# EAGLE board rtu (EAGLE 9.3.0)
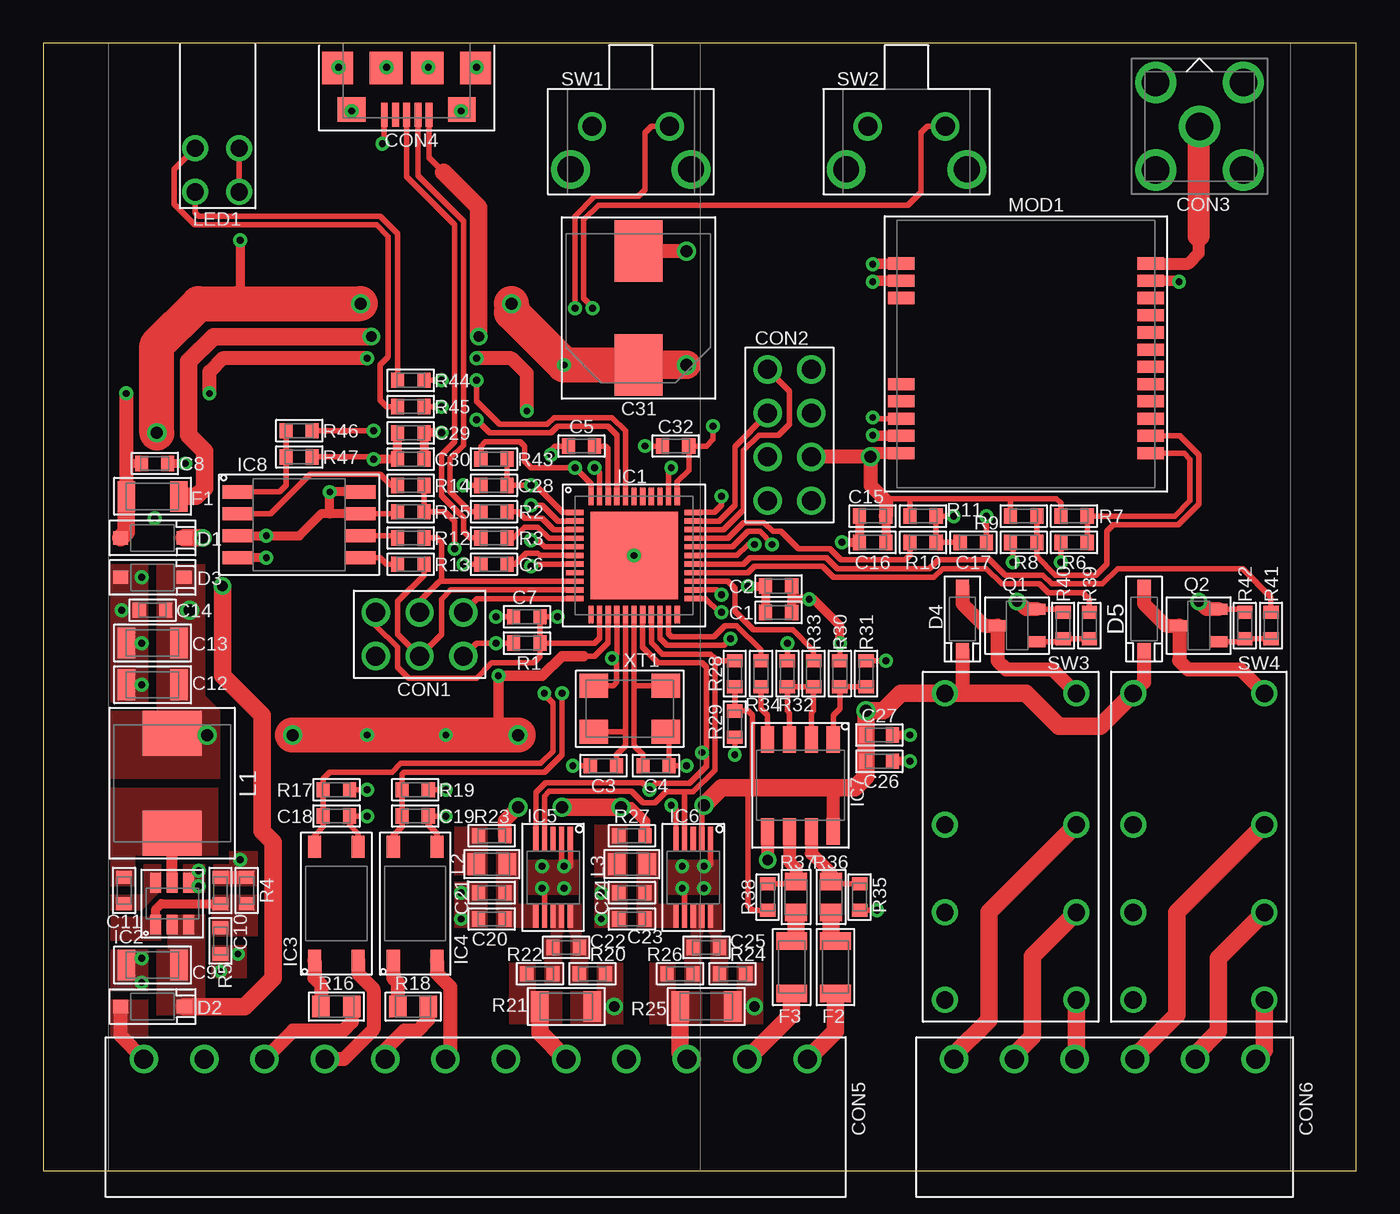
[diagram p0: board, top side]
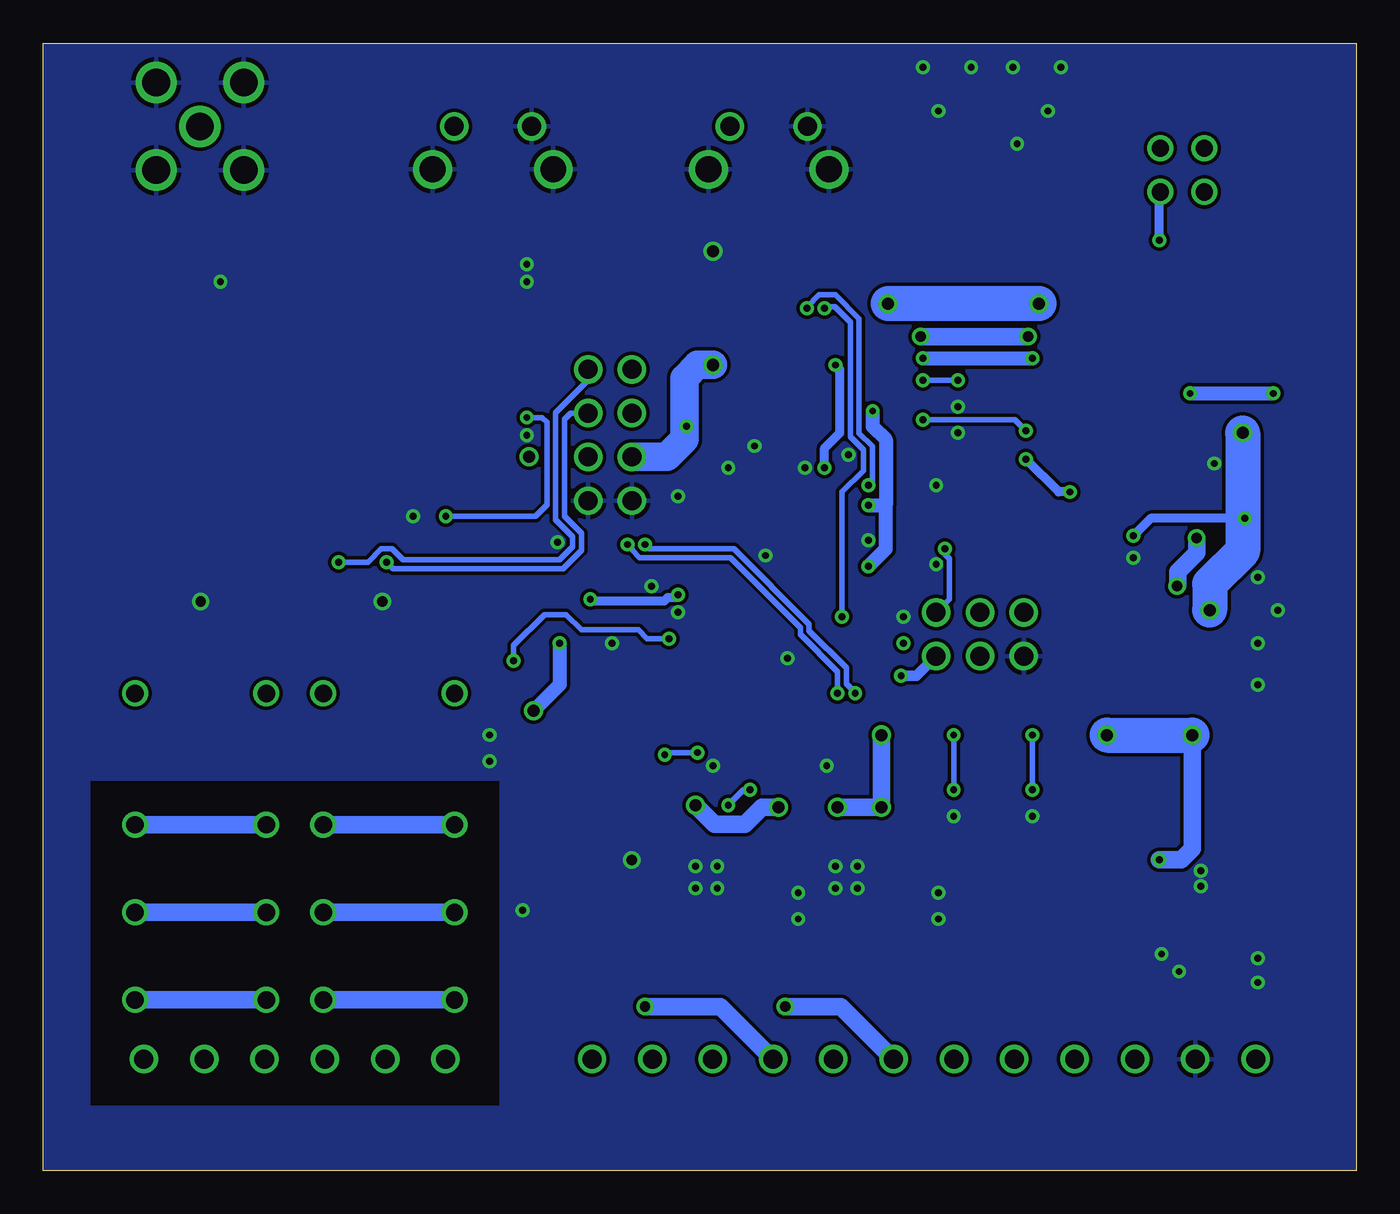
[diagram p1: board, bottom side, seen from below]

Size 76.2 x 65.41 mm. Coordinates in mm from the lower left corner, seen from the top.
Outline: 0,0 76.2,0 76.2,65.41 0,65.41 0,0
Copper layers (1*16): Top 0.035mm / dielectric 1.5mm / Bottom 0.035mm
Design rules "myparts": minimum track width 12mil, minimum drill 0.4mm, track to track 8mil, track to pad 8mil, pad to pad 8mil, via to via 8mil, smd to smd 0mil, copper to edge 0mil, drill to drill 6mil, minimum pad ring 10mil, minimum via ring 8mil, stop-mask expansion 4mil, vias tented up to drill 25mil, thermal gap 10mil

## Footprints (pad centres in the part's own frame; a part is rotated, then mirrored left to right if it is on the bottom)
0603 = smd 0.762 x 0.889: 1 -0.762,0; 2 0.762,0
1206 = smd 1.016 x 1.778: 1 -1.524,0; 2 1.524,0
CAPACITOR-SMD-8 = smd 2.794 x 3.556: 1 0,3.302; 2 0,-3.302
ISP = drill 1.1 pad 1.65: 1 0,0; 2 2.54,0; 3 0,-2.54; 4 2.54,-2.54; 5 0,-5.08; 6 2.54,-5.08
HEADER-8P-2R-DIP-2_54MM = drill 1.1 pad 1.65: 1 0,0; 2 2.54,0; 3 5.08,0; 4 7.62,0; 5 0,2.54; 6 2.54,2.54; 7 5.08,2.54; 8 7.62,2.54
SMA-RF = drill 1.6: 1 0,0; 2 -2.54,2.54; 3 -2.54,-2.54; 4 2.54,-2.54; 5 2.54,2.54
USB-MICRO-B-SMD = smd 0.4 x 1.4: 1 -1.3,4.15; 2 -0.65,4.15; 3 0,4.15; 4 0.65,4.15; 5 1.3,4.15 | smd 1.6 x 1.4: 6 -3.2,3.85; 7 3.2,3.85 | smd 1.8 x 1.9: 8 -4,1.45; 11 4,1.45 | smd 1.9 x 1.9: 9 -1.2,1.45; 10 1.2,1.45
KF2EDGR-3.5-12P = drill 1.1: 1 19.25,0; 2 15.75,0; 3 12.25,0; 4 8.75,0; 5 5.25,0; 6 1.75,0; 7 -1.75,0; 8 -5.25,0; 9 -8.75,0; 10 -12.25,0; 11 -15.75,0; 12 -19.25,0
KF2EDGR-3.5-6P = drill 1.1: 1 8.75,0; 2 5.25,0; 3 1.75,0; 4 -1.75,0; 5 -5.25,0; 6 -8.75,0
SOD123-DIODE = smd 0.889 x 0.762: 1 -1.841,0; 2 1.841,0
QFN-44 = smd 1.016 x 0.305: 1 -3.429,2.5; 2 -3.429,2; 3 -3.429,1.5; 4 -3.429,1; 5 -3.429,0.5; 6 -3.429,0; 7 -3.429,-0.5; 8 -3.429,-1; 9 -3.429,-1.5; 10 -3.429,-2; 11 -3.429,-2.5; 23 3.429,-2.5; 24 3.429,-2; 25 3.429,-1.5; 26 3.429,-1; 27 3.429,-0.5; 28 3.429,0; 29 3.429,0.5; 30 3.429,1; 31 3.429,1.5; 32 3.429,2; 33 3.429,2.5 | smd 0.305 x 1.016: 12 -2.5,-3.429; 13 -2,-3.429; 14 -1.5,-3.429; 15 -1,-3.429; 16 -0.5,-3.429; 17 0,-3.429; 18 0.5,-3.429; 19 1,-3.429; 20 1.5,-3.429; 21 2,-3.429; 22 2.5,-3.429; 34 2.5,3.429; 35 2,3.429; 36 1.5,3.429; 37 1,3.429; 38 0.5,3.429; 39 0,3.429; 40 -0.5,3.429; 41 -1,3.429; 42 -1.5,3.429; 43 -2,3.429; 44 -2.5,3.429 | smd 5.08 x 5.08: 45 0,0
SOT23-6 = smd 1.143 x 0.635: 1 -1.206,0.95; 2 -1.206,0; 3 -1.206,-0.95; 4 1.206,-0.95; 5 1.206,0; 6 1.206,0.95
OPTO-SMD = smd 1.27 x 0.762: 1 -3.3,1.27; 2 -3.3,-1.27; 3 3.3,-1.27; 4 3.3,1.27
VSSOP-10 = smd 1.397 x 0.3: 1 -2.223,1; 2 -2.223,0.5; 3 -2.223,0; 4 -2.223,-0.5; 5 -2.223,-1; 6 2.223,-1; 7 2.223,-0.5; 8 2.223,0; 9 2.223,0.5; 10 2.223,1
SOIC-8 = smd 1.524 x 0.762: 1 -2.667,1.905; 2 -2.667,0.635; 3 -2.667,-0.635; 4 -2.667,-1.905; 5 2.667,-1.905; 6 2.667,-0.635; 7 2.667,0.635; 8 2.667,1.905
SOIC-8-208 = smd 1.778 x 0.762: 1 -3.556,1.905; 2 -3.556,0.635; 3 -3.556,-0.635; 4 -3.556,-1.905; 5 3.556,-1.905; 6 3.556,-0.635; 7 3.556,0.635; 8 3.556,1.905
INDUCTOR-0520-0630 = smd 2.6 x 3.4: 1 -2.9,0; 2 2.9,0
0805 = smd 1.016 x 1.27: 1 -0.889,0; 2 0.889,0
LED-HOLDER-2P = drill 1: 1 1.27,6.096; 2 -1.27,6.096; 3 1.27,8.636; 4 -1.27,8.636
RAK4200 = smd 1.524 x 0.7: 1 -7.239,5.75; 2 -7.239,4.75; 3 -7.239,3.75; 4 -7.239,2.75; 5 -7.239,1.75; 6 -7.239,0.75; 7 -7.239,-0.25; 8 -7.239,-1.25; 9 -7.239,-2.25; 10 -7.239,-3.25; 11 -7.239,-4.25; 12 -7.239,-5.25; 13 7.239,-5.25; 14 7.239,-4.25; 15 7.239,-3.25; 16 7.239,1.75; 17 7.239,2.75; 18 7.239,3.75; 19 7.239,4.75; 20 7.239,5.75
SOT23-3 = smd 1.016 x 0.635: 1 -1.143,0.95; 2 -1.143,-0.95; 3 1.143,0
B3F-3150-52-55 = drill 1.1: 1 -2.25,0; 2 2.25,0 | drill 1.5: 3 -3.5,2.5; 4 3.5,2.5
HK19F = drill 1: C1 -3.81,1.27; C2 3.81,1.27; L1 -3.81,8.89; L2 3.81,8.89; NC1 -3.81,-3.81; NC2 3.81,-3.81; NO1 -3.81,-8.89; NO2 3.81,-8.89
CRYSTAL-5032-4P = smd 1.651 x 1.397: 1 -2.095,-1.333; 2 2.095,-1.333; 3 2.095,1.333; 4 -2.095,1.333

## Placement (x,y rotation side)
C1  [0603]  42.67,32.38 0 top
C2  [0603]  42.67,33.91 0 top
C3  [0603]  32.51,23.5 0 top
C4  [0603]  35.56,23.5 180 top
C5  [0603]  31.24,42.04 0 top
C6  [0603]  26.16,35.18 0 top
C7  [0603]  28.07,32.13 0 top
C8  [0603]  6.48,41.02 180 top
C9  [1206]  6.35,11.94 0 top
C10  [0603]  10.29,16.26 90 top
C11  [0603]  4.7,16.26 270 top
C12  [1206]  6.35,28.19 0 top
C13  [1206]  6.35,30.61 0 top
C14  [0603]  6.35,32.51 0 top
C15  [0603]  48.13,37.97 0 top
C16  [0603]  48.13,36.45 0 top
C17  [0603]  53.98,36.45 180 top
C18  [0603]  17.02,20.57 180 top
C19  [0603]  21.59,20.57 180 top
C20  [0603]  26.04,14.61 0 top
C21  [0603]  26.04,16.13 0 top
C22  [0603]  30.35,12.95 0 top
C23  [0603]  34.16,14.61 0 top
C24  [0603]  34.16,16.13 0 top
C25  [0603]  38.48,12.95 0 top
C26  [0603]  48.51,23.75 180 top
C27  [0603]  48.51,25.27 180 top
C28  [0603]  26.16,39.75 180 top
C29  [0603]  21.34,42.8 0 top
C30  [0603]  21.34,41.27 0 top
C31  [CAPACITOR-SMD-8]  34.54,50.04 0 top
C32  [0603]  36.7,42.04 0 top
CON1  [ISP]  24.38,32.38 270 top
CON2  [HEADER-8P-2R-DIP-2_54MM]  42.04,46.48 270 top
CON3  [SMA-RF]  67.1,60.58 0 top
CON4  [USB-MICRO-B-SMD]  21.1,65.41 180 top
CON5  [KF2EDGR-3.5-12P]  25.1,6.48 0 top
CON6  [KF2EDGR-3.5-6P]  61.6,6.48 0 top
D1  [SOD123-DIODE]  6.35,36.7 180 top
D2  [SOD123-DIODE]  6.35,9.53 180 top
D3  [SOD123-DIODE]  6.35,34.42 180 top
D4  [SOD123-DIODE]  53.34,32 90 top
D5  [SOD123-DIODE]  63.88,32 90 top
F1  [1206]  6.35,39.12 180 top
F2  [1206]  45.97,11.81 90 top
F3  [1206]  43.43,11.81 90 top
IC1  [QFN-44]  34.29,35.69 0 top
IC2  [SOT23-6]  7.49,15.49 90 top
IC3  [OPTO-SMD]  17.02,15.49 90 top
IC4  [OPTO-SMD]  21.59,15.49 90 top
IC5  [VSSOP-10]  29.59,17.02 270 top
IC6  [VSSOP-10]  37.72,17.02 270 top
IC7  [SOIC-8]  43.94,22.35 270 top
IC8  [SOIC-8-208]  14.86,37.47 0 top
L1  [INDUCTOR-0520-0630]  7.49,22.48 270 top
L2  [0805]  26.04,17.78 0 top
L3  [0805]  34.16,17.78 0 top
LED1  [LED-HOLDER-2P]  10.1,65.41 180 top
MOD1  [RAK4200]  57.02,47.37 180 top
Q1  [SOT23-3]  56.52,31.62 180 top
Q2  [SOT23-3]  67.06,31.62 180 top
R1  [0603]  28.07,30.61 0 top
R2  [0603]  26.16,38.23 0 top
R3  [0603]  26.16,36.7 0 top
R4  [0603]  11.81,16.26 270 top
R5  [0603]  10.29,13.34 90 top
R6  [0603]  59.82,36.45 0 top
R7  [0603]  59.82,37.97 180 top
R8  [0603]  56.9,36.45 0 top
R9  [0603]  56.9,37.97 180 top
R10  [0603]  51.05,36.45 180 top
R11  [0603]  51.05,37.97 180 top
R12  [0603]  21.34,36.7 0 top
R13  [0603]  21.34,35.18 0 top
R14  [0603]  21.34,39.75 0 top
R15  [0603]  21.34,38.23 0 top
R16  [0805]  17.02,9.53 180 top
R17  [0603]  17.02,22.1 180 top
R18  [0805]  21.46,9.53 180 top
R19  [0603]  21.59,22.1 180 top
R20  [0603]  31.88,11.43 0 top
R21  [1206]  30.35,9.53 0 top
R22  [0603]  28.83,11.43 180 top
R23  [0603]  26.04,19.43 180 top
R24  [0603]  40.01,11.43 180 top
R25  [1206]  38.48,9.53 180 top
R26  [0603]  36.96,11.43 0 top
R27  [0603]  34.16,19.43 180 top
R28  [0603]  40.13,28.83 90 top
R29  [0603]  40.13,25.91 270 top
R30  [0603]  46.23,28.83 270 top
R31  [0603]  47.75,28.83 270 top
R32  [0603]  43.18,28.83 270 top
R33  [0603]  44.7,28.83 270 top
R34  [0603]  41.66,28.83 270 top
R35  [0603]  47.37,15.88 90 top
R36  [0805]  45.72,15.88 90 top
R37  [0805]  43.69,15.88 90 top
R38  [0603]  42.04,15.88 90 top
R39  [0603]  60.71,31.62 90 top
R40  [0603]  59.18,31.62 270 top
R41  [0603]  71.25,31.62 90 top
R42  [0603]  69.72,31.62 270 top
R43  [0603]  26.16,41.27 180 top
R44  [0603]  21.34,45.85 180 top
R45  [0603]  21.34,44.32 180 top
R46  [0603]  14.86,42.93 180 top
R47  [0603]  14.86,41.4 180 top
SW1  [B3F-3150-52-55]  34.1,60.58 180 top
SW2  [B3F-3150-52-55]  50.1,60.58 180 top
SW3  [HK19F]  56.13,18.8 0 top
SW4  [HK19F]  67.06,18.8 0 top
XT1  [CRYSTAL-5032-4P]  34.04,26.8 0 top

## Library data of the parts
C1-C32 CON1-CON6 D1-D5 F1-F3 IC1-IC8 L1-L3 LED1 MOD1 Q1 Q2 R1-R47 SW1-SW4 XT1 = myparts

## Nets
GND: C1.1 C2.1 C3.1 C4.1 C5.1 C6.1 C7.1 C8.1 C9.1 C12.1 C13.1 C14.1 C15.1 C16.1 C17.1 C18.1 C19.1 C20.1 C21.1 C23.1 C24.1 C26.1 C27.1 C28.2 C29.2 C30.2 C31.1 C32.1 CON1.6 CON2.4 CON2.8 CON3.2 CON3.3 CON3.4 CON3.5 CON4.5 CON4.6 CON4.7 CON4.8 CON4.9 CON4.10 CON4.11 CON5.11 D3.2 IC1.5 IC1.15 IC1.23 IC1.33 IC1.35 IC1.43 IC1.45 IC2.4 IC3.3 IC4.3 IC5.1 IC5.2 IC5.7 IC6.1 IC6.7 IC7.5 IC8.4 MOD1.11 MOD1.13 MOD1.14 MOD1.19 Q1.2 Q2.2 R5.1 R32.1 R35.1 R40.1 R42.1 R45.1 SW1.2 SW1.3 SW1.4 SW2.2 SW2.3 SW2.4 XT1.2 XT1.4
N$1: IC1.40 R44.1
N$2: C17.2 MOD1.18 R10.1 R11.1
N$3: CON1.1 IC1.11 R14.2 R15.2
N$4: CON3.1 MOD1.12
N$5: CON2.2 IC1.32
N$6: MOD1.1 R6.2 R7.1
N$7: MOD1.2 R8.2 R9.1
N$8: LED1.1 R45.2
N$9: CON1.4 IC1.10 R13.2
N$10: C3.2 IC1.16 XT1.1
N$11: CON2.1 IC1.31
N$12: C4.2 IC1.17 XT1.3
N$13: C15.2 C16.2 CON2.7 MOD1.20 R7.2 R9.2 R11.2
N$14: CON2.5 R6.1
N$15: LED1.3 R44.2
N$16: CON2.6 R8.1
N$17: C25.1 IC6.8 IC6.9 R26.2
N$18: CON4.2 R2.1
N$19: CON4.3 R3.1
N$20: IC3.1 R16.2
N$21: C25.2 IC6.10 R24.2
N$22: IC1.30 R10.2
N$24: IC1.27 R41.2
N$25: IC8.1 R46.2 R47.2
N$26: Q2.1 R41.1 R42.2
N$27: L3.1 R27.2
N$28: D5.2 Q2.3 SW4.L2
N$29: C28.1 IC1.1 R43.1 SW2.1
N$30: CON5.4 R24.1 R25.1
N$31: C5.2 IC1.42
N$32: C19.2 IC1.29 IC4.4 R19.2
N$33: IC4.1 R18.2
N$34: C6.2 IC1.6
N$35: C18.2 IC1.28 IC3.4 R17.2
N$36: Q1.1 R39.1 R40.2
N$37: D4.2 Q1.3 SW3.L2
N$38: IC1.26 R39.2
N$39: CON6.6 SW3.C1 SW3.C2
N$40: CON5.3 R25.2 R26.1
N$41: C7.2 CON1.5 IC1.13 R1.2 SW1.1
N$42: C23.2 C24.2 IC6.6 L3.2
N$43: IC1.3 R2.2
N$44: IC1.4 R3.2
N$45: CON1.3 IC1.9 R12.2
N$46: CON5.2 F3.1
N$47: IC7.1 R30.2 R31.2
N$48: IC7.4 R34.2
N$49: CON5.7 IC4.2
N$50: CON5.9 IC3.2
N$51: IC7.7 R35.2 R36.2
N$52: IC7.6 R37.2 R38.2
N$53: IC7.2 IC7.3 R32.2 R33.2
N$54: F3.2 R37.1
N$55: CON5.8 R18.1
N$56: CON4.1 F1.1
N$57: C9.2 D1.1 D2.1 IC2.2 IC2.3
N$58: IC8.6 R12.1
N$59: CON5.6 R20.2 R21.2
N$60: CON5.1 F2.1
N$61: IC1.20 R31.1
N$62: IC1.21 R34.1
N$63: IC1.25 R33.1
N$64: CON5.5 R21.1 R22.2
N$65: C11.2 IC2.6
N$66: C11.1 IC2.5 L1.2
N$67: CON6.4 SW3.NO1 SW3.NO2
N$68: C22.2 IC5.10 R20.1
N$69: C22.1 IC5.8 IC5.9 R22.1
N$70: IC8.5 R13.1
N$71: L2.1 R23.2
N$72: C10.1 IC2.1 R4.2 R5.2
N$73: IC1.18 IC5.5 IC6.5 R29.2
N$74: CON6.5 SW3.NC1 SW3.NC2
N$75: CON6.3 SW4.C1 SW4.C2
N$76: CON6.2 SW4.NC1 SW4.NC2
N$77: C20.2 C21.2 IC5.6 L2.2
N$78: CON6.1 SW4.NO1 SW4.NO2
N$79: IC1.19 IC5.4 IC6.4 R28.2
N$80: F2.2 R36.1
N$85: CON5.10 R16.1
N$86: IC1.41 R46.1
N$87: IC8.2 R14.1
UVCC: C8.2 D1.2 F1.2 IC1.2 IC1.7
VCC: C1.2 C2.2 C10.2 C12.2 C13.2 C14.2 C26.2 C27.2 C29.1 C30.1 C31.2 C32.2 CON1.2 CON2.3 D3.1 D4.1 D5.1 IC1.14 IC1.24 IC1.34 IC1.44 IC6.2 IC7.8 IC8.3 IC8.7 IC8.8 L1.1 LED1.2 LED1.4 R1.1 R4.1 R15.1 R17.1 R19.1 R23.1 R27.1 R28.1 R29.1 R30.1 R38.1 R43.2 R47.1 SW3.L1 SW4.L1
VEXT: CON5.12 D2.2

## Tracks (layer width: path | path; a pad name or v marks a point on that pad's centre or on a via)
GND  (via drill 0.4, 0.6, 0.7)
  Top 0.305: C3.1 v30.73,23.5 | v37.34,23.5 C4.1 36.32,25.27 XT1.2 | v43.18,30.61 R32.1 | IC1.23 38.44,33.19 39.24,32.38 v39.37,32.38 | IC1.15 33.29,29.99 v33.02,29.72 33.28,29.46 33.28,28.33 33.08,28.13 XT1.4 | v26.29,32.13 C7.1 | IC1.33 38.95,38.19 39.37,38.61 v39.37,39.12 | IC1.5 29.09,36.19 28.7,36.58 v28.32,36.58 | v24.38,35.18 C6.1 | IC1.43 32.29,40.48 v32,40.77 | C5.1 29.72,42.04 29.46,41.78 v29.46,41.53 | IC1.35 36.29,40.61 v36.45,40.77 | v24.38,39.75 C28.2 | CON4.5 19.8,59.68 v19.68,59.56 | C17.1 v54.74,37.97 | v48.39,15.11 R35.1 | v17.14,64.01 v17.14,64 CON4.11 | v19.94,64.01 19.9,63.97 CON4.10 | v22.35,64.01 CON4.9 | v25.15,64.01 25.1,63.96 CON4.8 | v17.91,61.47 v17.9,61.48 CON4.7 | v24.26,61.47 24.3,61.51 CON4.6 | Q1.2 58.99,32.57 R40.1 | Q2.2 69.53,32.57 R42.1 | IC5.7 29.09,16.38 v28.96,16.38 | IC5.2 30.09,17.65 v30.23,17.65 30.59,17.65 IC5.1 | IC6.7 37.22,16.25 v37.08,16.38 | IC6.1 38.72,17.76 38.61,17.65 v38.35,17.65 | v18.8,20.57 C18.1 17.78,20.07 18.29,19.56 IC3.3 | IC4.3 22.86,19.56 22.35,20.07 C19.1 v23.37,20.57 | C32.1 v34.92,42.04 | v23.11,44.32 R45.1
  Top 0.508: C30.2 C29.2 v23.11,42.8 | C15.1 C16.1 v46.35,36.45 | C1.1 C2.1 v40.89,33.91 | v50.29,25.27 C27.1 | v8.26,41.02 C8.1 | v50.29,23.75 C26.1 | v12.95,35.56 IC8.4
  Top 0.61: MOD1.13 48.18,52.62 v48.13,52.58 | MOD1.14 48.19,51.62 v48.13,51.56 | MOD1.19 48.18,42.62 v48.13,42.67 | MOD1.11 65.85,51.62 v65.91,51.56
  Top 0.762: IC7.5 v42.04,18.03
  Top 0.813: Q1.2 57.02,32.57 56.58,33.02 v56.52,33.02 | v37.34,53.34 C31.1 | Q2.2 67.5,32.57 v67.06,33.02
  other vias: 34.29,35.69 5.71,34.42 4.57,32.51 5.71,30.61 5.71,28.19 9.02,17.4 9.02,16.51 11.3,12.57 5.71,12.32 5.71,10.92 24.26,16.13 24.26,14.61 32.38,16.13 32.38,14.61 28.96,17.65 30.23,16.38 37.08,17.65 38.35,16.38 10.29,11.56
  pour Bottom: 0.13,0.13 0.13,65.28 76.07,65.28 76.07,0.13
  pour Top (no thermals): 3.94,27.18 6.1,27.18 6.1,35.18 3.94,35.18
  pour Top (no thermals): 8.13,16.13 8.13,17.78 9.4,17.78 9.4,16.13
  pour Top (no thermals): 3.94,12.83 6.1,12.83 6.1,10.41 3.94,10.41
  pour Top (no thermals): 23.88,16.76 25.78,16.76 25.78,14.1 23.88,14.1
  pour Top (no thermals): 32,16.64 33.91,16.64 33.91,14.1 32,14.1
  pour Top (no thermals): 28.07,18.03 28.07,16 31.11,16 31.11,18.03
  pour Top (no thermals): 36.2,18.03 36.2,16 39.24,16 39.24,18.03
  pour Top (no thermals): 9.78,13.08 11.81,13.08 11.81,11.18 9.78,11.18
GNDX
  cutout Bottom: 49.78,3.81 73.41,3.81 73.41,22.61 49.78,22.61
N$1  (via drill 0.4)
  Top 0.305: IC1.40 33.79,42.92 33.02,43.69 29.64,43.69 29.25,43.31 26.47,43.31 25.15,44.63 v25.15,45.85 | v23.11,45.85 R44.1
  Bottom 0.305: v23.11,45.85 v25.15,45.85
N$2  (via drill 0.4)
  Top 0.305: MOD1.18 48.2,43.62 v48.13,43.69 | C17.2 R10.1 R11.1 v52.83,37.97
  Bottom 0.305: v48.13,43.69 47.24,43.69 46.97,43.41 46.97,38.63 47.62,37.97 v52.83,37.97
N$3  (via drill 0.4)
  Top 0.305: R14.2 R15.2 23.33,38.23 23.88,37.68 v23.88,36.07 | CON1.1 25.19,33.19 IC1.11
  Bottom 0.305: v23.88,36.07 23.88,35.74 23.62,35.49 23.62,33.14 CON1.1
N$4
  Top 0.686: MOD1.12 66.46,52.62 67.06,53.21 67.06,54.23
  Top 1.27: 67.06,54.23 67.06,60.28 CON3.1
N$5
  Top 0.305: IC1.32 39.21,37.69 40.13,38.61 40.13,41.99 42.04,43.9 CON2.2
N$6
  Top 0.305: R6.2 R7.1 65.66,37.97 66.55,38.86 66.55,41.27 66.2,41.62 MOD1.1
N$7
  Top 0.305: R9.1 R8.2 57.66,35.63 58.74,34.55 58.8,34.55 58.8,34.54 61.09,34.54 61.72,35.18 61.72,37.08 62.1,37.47 65.87,37.47 67.06,38.65 67.06,41.53 65.96,42.62 MOD1.2
N$8
  Top 0.305: LED1.1 7.62,58.1 7.62,56.05 8.81,54.86 19.35,54.86 20.02,54.19 20.02,47.2 19.56,46.74 19.56,44.7 19.94,44.32 R45.2
N$9
  Top 0.305: IC1.10 23.65,33.69 23.11,33.15 23.11,31.11 CON1.4 20.57,31.11 20.57,33.02 22.1,34.54 R13.2
N$10
  Top 0.305: IC1.16 33.79,25.46 | 33.79,25.46 XT1.1 | 33.79,25.46 33.79,24.65 33.27,24.13 C3.2
N$11
  Top 0.305: IC1.31 39.47,37.19 40.64,38.35 40.64,41.78 41.53,42.67 42.67,42.67 43.31,43.31 43.31,45.21 CON2.1
N$12
  Top 0.305: IC1.17 34.29,28.13 | 34.29,28.13 XT1.3 | 34.29,28.13 34.29,24.64 34.8,24.13 C4.2
N$13  (via drill 0.7)
  Top 0.305: R7.2 59.05,38.73 58.8,38.99 56.13,38.99 | R9.2 56.13,38.99 | 56.13,38.99 50.29,38.99 | R11.2 50.29,38.99 | 50.29,38.99 48.77,38.99 48.7,39.05
  Top 0.508: C15.2 C16.2
  Top 0.686: MOD1.20 48.23,41.62 v48.01,41.4
  Top 0.813: CON2.7 v48.01,41.4 48.01,39.75 48.7,39.05 48.9,38.86 C15.2
N$14  (via drill 0.4)
  Top 0.305: R6.1 v59.05,35.31
  Bottom 0.305: CON2.5 44.58,45.85 46.46,43.96 46.46,37.76 45.47,36.76 45.47,36.19 46.23,35.43 55.31,35.43 55.95,36.06 56.58,36.06 57.33,35.31 v59.05,35.31
N$15
  Top 0.305: LED1.3 8.83,55.56 9.02,55.37 19.56,55.37 20.57,54.36 R44.2
N$16  (via drill 0.4)
  Top 0.305: R8.1 56.26,36.32 v56.26,35.31
  Bottom 0.305: CON2.6 45.59,43.94 45.95,43.58 45.95,37.97 44.96,36.97 44.96,35.98 46.02,34.92 55.88,34.92 v56.26,35.31
N$17
  pour Top (no thermals): 37.21,13.59 37.59,13.59 37.59,15.49 38.35,15.49 38.35,13.84 38.23,13.72 38.23,10.79 37.21,10.79
N$18
  Top 0.305: R2.1 24.77,38.23 23.62,39.37 23.62,41.32 24.38,42.08 24.38,55.07 21.75,57.71 CON4.2
N$19
  Top 0.305: R3.1 24.77,36.7 24.38,37.08 24.38,37.89 23.11,39.16 23.11,41.53 23.88,42.29 23.88,54.86 21.1,57.64 CON4.3
N$20
  Top 0.813: IC3.1 15.75,11.18 16.13,10.79 R16.2
N$21
  pour Top (no thermals): 38.61,15.49 38.61,13.84 38.73,13.72 38.73,10.79 39.75,10.79 39.75,13.59 39.37,13.59 39.37,15.49
N$22
  Top 0.305: R10.2 50.29,35.69 50.04,35.43 46.3,35.43 45.66,36.07 43.81,36.07 42.8,37.08 42.35,37.08 41.84,37.59 40.64,37.59 39.73,36.69 IC1.30
N$24
  Top 0.305: IC1.27 40.65,35.19 41.02,35.56 45.45,35.56 46.09,34.92 51.44,34.92 51.94,35.43 54.95,35.43 55.83,34.55 58.02,34.55 58.53,34.04 61.47,34.04 62.36,34.92 69.6,34.92 71.25,33.27 R41.2
N$25
  Top 0.305: R46.2 R47.2 14.1,39.75 13.72,39.37 IC8.1
N$26
  Top 0.305: Q2.1 69.53,30.67 R42.2 R41.1
N$27
  pour Top (no thermals): 33.91,20.07 32,20.07 32,17.02 33.91,17.02
N$28
  Top 0.813: D5.2 63.88,32.89 65.15,31.62 Q2.3 65.91,29.59 66.42,29.08 69.47,29.08 SW4.L2
N$29  (via drill 0.4)
  Top 0.305: IC1.1 30.14,38.19 28.57,39.75 v28.32,39.75 C28.1 R43.1 | v31.88,50.04 31.88,50.09 31.37,50.6 31.37,55.16 32.21,56.01 50.16,56.01 50.93,56.77 50.93,60.2 51.31,60.58 SW2.1
  Bottom 0.305: v28.32,39.75 28.09,39.98 28.09,42.02 28.85,42.78 28.85,49.43 30.22,50.8 31.18,50.8 31.88,50.09 v31.88,50.04
N$30  (via drill 0.6)
  Bottom 1.016: v41.27,9.53 36.9,9.53 CON5.4
  pour Top (no thermals): 40.26,12.06 41.78,12.06 41.78,8.51 38.73,8.51 38.73,10.41 40.26,10.41
N$31
  Top 0.305: C5.2 32.64,42.04 32.79,41.89 IC1.42
N$32  (via drill 0.4)
  Top 0.305: IC4.4 20.32,19.43 20.83,19.94 C19.2 R19.2 20.83,22.99 20.95,23.11 29.08,23.11 30.1,24.13 v30.1,27.69 | IC1.29 40,36.19 40.89,37.08 41.59,37.08 42.29,36.38 v42.29,36.32
  Bottom 0.305: v42.29,36.32 42.03,36.06 42.03,36.01 41.59,35.56 36.32,35.56 32.26,31.5 32.26,31.11 30.1,28.96 v30.1,27.69
N$33
  Top 0.813: IC4.1 20.32,11.18 20.57,10.92 R18.2
N$34
  Top 0.305: IC1.6 28.83,35.69 28.7,35.81 28.01,35.81 27.38,35.18 C6.2
N$35  (via drill 0.4)
  Top 0.305: IC3.4 15.75,19.43 16.26,19.94 C18.2 R17.2 16.26,22.73 16.64,23.11 20.24,23.11 20.75,23.62 28.87,23.62 29.59,24.34 29.59,27.12 29.34,27.37 29.34,27.43 v29.08,27.69 | IC1.28 40.26,35.69 40.89,36.32 v41.27,36.32
  Bottom 0.305: v41.27,36.32 41.02,36.07 36.11,36.07 31.75,31.71 31.75,31.32 29.59,29.17 29.59,28.25 29.08,27.74 v29.08,27.69
N$36
  Top 0.305: Q1.1 58.99,30.67 R40.2 R39.1
N$37
  Top 0.813: D4.2 53.34,32.89 54.61,31.62 Q1.3 55.37,29.59 55.88,29.08 58.55,29.08 SW3.L2
N$38
  Top 0.305: IC1.26 40.91,34.69 41.27,35.05 45.21,35.05 45.85,34.42 51.69,34.42 52.2,34.92 54.74,34.92 55.62,34.04 57.81,34.04 58.32,33.53 60.33,33.53 60.71,33.15 R39.2
N$39
  Top 1.016: CON6.6 52.85,6.73 54.86,8.74 54.86,14.99 SW3.C2
  Bottom 1.016: SW3.C1 SW3.C2
N$40
  Top 1.016: R25.2 36.96,6.87 CON5.3
  pour Top (no thermals): 36.7,12.06 35.18,12.06 35.18,8.51 38.23,8.51 38.23,10.41 36.7,10.41
N$41  (via drill 0.4)
  Top 0.305: R1.2 C7.2 v29.84,32.13 | v30.86,50.04 30.86,55.37 32,56.52 34.54,56.52 34.92,56.9 34.92,60.2 35.31,60.58 SW1.1 | CON1.5 19.3,31.62 20.57,30.35 20.57,29.21 21.21,28.57 25.15,28.57 26.04,29.46 28.45,29.46 28.83,29.84 R1.2 | IC1.13 32.29,30.89 32,30.61 R1.2
  Bottom 0.305: v29.84,32.13 29.84,39.37 28.6,40.62 28.6,41.81 29.36,42.57 29.36,49.22 30.27,50.12 30.78,50.12 v30.86,50.04
N$42
  pour Top (no thermals): 34.42,18.54 35.69,18.54 35.69,15.49 36.83,15.49 36.83,14.1 34.42,14.1
N$43
  Top 0.305: IC1.3 29.61,37.19 28.96,37.85 27.94,37.85 27.56,38.23 R2.2
N$44
  Top 0.305: IC1.4 29.35,36.69 28.7,37.34 27.94,37.34 27.3,36.7 R3.2
N$45
  Top 0.305: CON1.3 21.84,33.02 23.01,34.19 23.11,34.19 | 23.11,34.19 IC1.9 | R12.2 22.86,36.7 23.11,36.45 23.11,34.19
N$46
  Top 1.016: F3.1 43.43,9.06 CON5.2
N$47
  Top 0.305: R31.2 R30.2 46.23,26.8 45.85,26.42 IC7.1
N$48
  Top 0.305: R34.2 41.66,26.8 42.04,26.42 IC7.4
N$49
  Top 0.813: IC4.2 22.86,11.43 23.62,10.67 23.62,6.75 CON5.7
N$50
  Top 0.813: IC3.2 18.29,11.43 19.18,10.54 19.18,8.21 17.44,6.48 CON5.9
N$51
  Top 0.305: R35.2 45.85,16.64 R36.2
  Top 0.762: IC7.7 44.58,18.41 45.72,17.27 R36.2
N$52
  Top 0.305: R38.2 43.56,16.64 R37.2
  Top 0.762: IC7.6 43.31,17.91 43.69,17.53 R37.2
N$53
  Top 0.305: IC7.3 43.31,26.54 43.18,26.67 R32.2 R33.2 44.7,26.67 44.58,26.54 IC7.2
N$54
  Top 1.016: R37.1 43.69,13.59 F3.2
N$55
  Top 0.813: R18.1 22.35,8.76 21.72,8.13 20.95,8.13 19.85,7.02 CON5.8
N$56  (via drill 0.6)
  Top 0.305: CON4.1 22.4,58.75 23.24,57.91
  Top 1.016: v19.05,48.39 9.91,48.39 8.46,46.94 8.46,42.65 9.37,41.74 9.37,39.59 8.89,39.12 F1.1 | v25.27,48.39 25.27,55.88 23.24,57.91
  Bottom 1.016: v25.27,48.39 v19.05,48.39
N$57  (via drill 0.6)
  Top 1.016: D2.1 11.68,9.53 13.34,11.18 13.34,19.05 12.7,19.68 12.7,26.42 10.41,28.7 v10.41,33.91 | D1.1 v9.27,36.7
  Bottom 1.016: v9.27,36.7 9.27,35.84 10.36,34.75 10.36,33.96 v10.41,33.91
  pour Top (no thermals): 7.24,14.86 9.4,14.86 9.4,12.83 7.24,12.83
  pour Top (no thermals): 9.4,12.83 6.6,12.83 6.6,9.02 9.4,9.02
N$58
  Top 0.305: R12.1 20.45,36.83 IC8.6
N$59  (via drill 0.6)
  Bottom 1.016: v33.15,9.53 29.9,9.53 CON5.6
  pour Top (no thermals): 32.13,12.06 33.66,12.06 33.66,8.51 30.61,8.51 30.61,10.41 32.13,10.41
N$60
  Top 1.016: F2.1 45.97,8.1 CON5.1
N$61  (via drill 0.4)
  Top 0.305: IC1.20 35.79,30.89 36.2,30.48 39.5,30.48 v39.88,30.86 | v48.9,29.59 R31.1
  Bottom 0.305: v39.88,30.86 41.15,30.86 41.66,31.37 44.96,31.37 45.85,32.26 47.12,32.26 48.9,30.48 v48.9,29.59
N$62
  Top 0.305: IC1.21 36.29,31.15 36.45,30.99 38.93,30.99 39.56,31.62 40.24,31.62 41.66,30.21 R34.1
N$63
  Top 0.305: IC1.25 39.73,34.19 40.13,33.78 40.13,32.45 41.22,31.37 43.49,31.37 44.7,30.16 R33.1
N$64
  Top 1.016: R21.1 28.83,8 CON5.5
  pour Top (no thermals): 27.05,12.06 28.57,12.06 28.57,10.41 30.1,10.41 30.1,8.51 27.05,8.51
N$65
  pour Top (no thermals): 3.94,15.11 5.71,15.11 6.86,16.26 6.86,17.78 5.84,17.78 5.84,16 3.94,16
N$66
  Top 0.61: 7.49,18.67 7.49,18.8 L1.2
  Top 0.635: IC2.5 7.49,18.67
  pour Top (no thermals): 3.94,16.51 5.33,16.51 5.33,18.29 10.16,18.29 10.16,22.23 3.94,22.23
N$67
  Top 1.016: SW3.NO2 59.94,6.57 CON6.4
  Bottom 1.016: SW3.NO1 SW3.NO2
N$68
  pour Top (no thermals): 30.48,15.49 31.24,15.49 31.24,13.59 31.62,13.59 31.62,10.79 30.61,10.79 30.61,13.72 30.48,13.84
N$69
  pour Top (no thermals): 29.46,15.49 30.23,15.49 30.23,13.84 30.1,13.72 30.1,10.79 29.08,10.79 29.08,13.59 29.46,13.59
N$70
  Top 0.305: IC8.5 19.56,35.56 19.94,35.18 R13.1
N$71
  pour Top (no thermals): 23.88,17.14 25.78,17.14 25.78,19.94 23.88,19.94
N$72
  Top 0.508: IC2.1 6.54,15.18 6.86,15.49 C10.1
  pour Top (no thermals): 9.78,13.59 9.78,15.24 9.91,15.24 9.91,16 12.45,16 12.45,13.59
  pour Top (no thermals): 6.86,13.72 6.86,13.34 3.94,13.34 3.94,14.73 6.86,14.73
N$73  (via drill 0.4)
  Top 0.305: IC1.18 34.79,30.36 35.69,29.46 38.23,29.46 38.48,29.21 38.48,24.51 v38.23,24.26 38.48,24 38.48,23.45 37.51,22.48 35.56,22.48 v35.18,22.1 34.77,22.51 29.16,22.51 28.59,21.94 IC5.5 | IC6.5 36.72,20.94 v36.45,21.21 | v40.13,24.13 R29.2
  Bottom 0.305: v35.18,22.1 35.56,22.1 v36.45,21.21 | v38.23,24.26 40.01,24.26 v40.13,24.13
N$74
  Top 1.016: CON6.5 56.35,6.73 57.4,7.79 57.4,12.45 SW3.NC2
  Bottom 1.016: SW3.NC1 SW3.NC2
N$75
  Top 1.016: CON6.3 63.35,6.6 65.79,9.04 65.79,14.99 SW4.C2
  Bottom 1.016: SW4.C1 SW4.C2
N$76
  Top 1.016: CON6.2 66.85,6.73 68.2,8.08 68.2,12.32 SW4.NC2
  Bottom 1.016: SW4.NC1 SW4.NC2
N$77
  pour Top (no thermals): 26.29,18.54 27.56,18.54 27.56,15.49 28.7,15.49 28.7,14.1 26.29,14.1
N$78
  Top 1.016: CON6.1 70.87,6.99 SW4.NO2
  Bottom 1.016: SW4.NO1 SW4.NO2
N$79
  Top 0.305: IC1.19 35.29,30.62 35.94,29.97 38.73,29.97 38.99,29.72 38.99,29.59 | IC6.4 37.22,21.97 | 37.22,21.97 37.72,21.97 38.99,23.24 38.99,29.59 | 37.22,21.97 36.14,21.97 35.51,21.34 34.8,21.34 34.13,22 29.37,22 29.09,21.73 IC5.4 | R28.2 38.99,29.59
N$80
  Top 1.016: R36.1 45.72,13.59 F2.2
N$85
  Top 0.813: R16.1 17.91,8.64 17.4,8.13 14.5,8.13 CON5.10
N$86  (via drill 0.4)
  Top 0.305: IC1.41 33.29,42.66 32.77,43.18 29.84,43.18 29.46,42.8 25.91,42.8 v25.15,43.56 | v19.18,42.93 R46.1
  Bottom 0.305: v25.15,43.56 19.81,43.56 v19.18,42.93
N$87
  Top 0.305: R14.1 20.19,39.75 19.56,40.39 15.49,40.39 13.21,38.1 IC8.2
UVCC  (via drill 0.4)
  Top 0.305: IC1.7 28.46,35.19 v28.32,35.05 | IC1.2 29.88,37.69 28.96,38.61 v28.32,38.61
  Top 0.508: C8.2 4.83,41.02
  Top 0.813: v18.8,47.12 10.41,47.12 9.65,46.35 v9.65,45.09 | v28.07,44.07 28.07,46.23 27.18,47.12 v25.15,47.12 | v4.83,45.09 4.83,41.02 F1.2
  Top 1.016: D1.2 4.83,37.02 F1.2
  Bottom 0.813: v9.65,45.09 v4.83,45.09 | v28.32,35.05 27.3,36.07 27.3,38.61 | v28.07,44.07 28.07,43.18 27.3,42.42 27.3,38.61 | v28.32,38.61 27.3,38.61 | v25.15,47.12 v18.8,47.12
VCC  (via drill 0.4, 0.7)
  Top 0.305: IC1.24 39.08,33.69 v39.37,33.4 | v46.23,30.61 R30.1 | IC1.14 32.79,30.63 32,29.84 31.37,29.84 | IC1.44 31.79,39.84 v30.86,40.77 28.32,40.77 27.94,41.15 27.94,42.04 27.69,42.29 25.65,42.29 25.4,42.04 R43.2 | IC1.34 36.79,39.97 37.47,40.64 C32.2 38.48,42.04 38.86,42.42 v38.86,43.18 | LED1.2 LED1.4 | R15.1 20.45,38.1 IC8.7 | R1.1 v26.29,30.61 25.15,30.61 CON1.2 | IC6.2 38.22,21.07 v38.35,21.21 | v19.18,41.27 19.05,41.4 R47.1 | v18.8,22.1 R17.1 | v23.37,22.1 R19.1 | R28.1 R29.1 40.89,26.67 41.15,26.42 41.15,22.23 | R38.1 41.15,15.11 40.89,15.37 40.89,21.97 40.64,22.23
  Top 0.508: C2.2 43.43,33.15 | 43.43,33.15 C1.2 | v46.23,30.61 46.23,31.62 44.7,33.15 v44.45,33.15 43.43,33.15 | v19.18,41.27 C30.1 C29.1 | v11.43,53.98 11.43,50.42 11.3,50.29 | IC8.3 v12.95,36.83 14.86,36.83 16.13,38.1 16.64,38.1 | IC8.7 16.64,38.1 | IC8.8 v16.64,39.37 16.64,38.1
  Top 0.61: 31.37,29.84 30.1,29.84 28.96,28.7 v26.42,28.7 26.42,25.27 | v33.53,21.08 34.12,21.08 34.92,20.27 R27.1
  Top 0.762: C10.2 R4.1 | IC7.8 45.85,22.23
  Top 0.813: D4.1 53.34,27.69 | D5.1 63.88,28.32 SW4.L1 | R23.1 26.8,20.32 v27.56,21.08
  Top 1.016: SW4.L1 61.34,25.78 58.93,25.78 57.02,27.69 53.34,27.69 SW3.L1 49.78,27.69 48.77,26.67 v47.75,26.67 C27.2 C26.2 47.75,22.86 47.12,22.23 45.85,22.23 41.15,22.23 40.64,22.23 39.37,22.23 v38.35,21.21 | v30.1,21.08 v33.53,21.08
  Top 1.651: v37.34,46.74 C31.2
  Top 2.032: v6.6,42.8 6.6,47.88 9.02,50.29 11.3,50.29 v18.41,50.29 | v27.18,50.29 27.18,49.78 v30.23,46.74 C31.2 | v14.48,25.27 v18.8,25.27 v23.37,25.27 26.42,25.27 v27.56,25.27
  Bottom 0.305: v18.8,25.27 v18.8,22.1 | v23.37,25.27 v23.37,22.1 | v6.48,37.85 6.6,37.72 6.6,35.94
  Bottom 0.508: v11.43,53.98 11.43,56.71 LED1.4 | v30.86,40.77 30.86,41.91 29.97,42.8 29.97,46.48 v30.23,46.74 | v38.86,43.18 38.99,43.05 38.99,42.42 | v39.37,33.4 39.53,33.24 39.96,33.24 40.16,33.05 44.35,33.05 v44.45,33.15 | v16.64,39.37 17.27,39.37 v19.18,41.27 | v6.48,37.85 11.94,37.85 v12.95,36.83
  Bottom 0.61: CON1.2 25.53,28.7 v26.42,28.7
  Bottom 0.813: v46.23,30.61 46.23,28.19 v47.75,26.67
  Bottom 1.016: v11.43,18.03 10.16,18.03 9.53,18.67 v9.53,25.27 | v33.53,21.08 34.49,21.08 35.48,20.09 37.24,20.09 v38.35,21.21 | v30.1,21.08 v27.56,21.08 v27.56,25.27
  Bottom 1.651: v37.34,46.74 38.23,46.74 38.99,45.97 38.99,42.42 40.01,41.4 CON2.3
  Bottom 2.032: v8.51,32.51 8.51,34.04 6.6,35.94 v6.6,42.8 | v18.41,50.29 v27.18,50.29 | v14.48,25.27 v9.53,25.27
  pour Top (no thermals): 6.6,26.67 6.6,35.18 9.4,35.18 9.4,27.56 10.29,26.67 10.29,22.73 3.94,22.73 3.94,26.67
  pour Top (no thermals): 9.91,16.51 12.45,16.51 12.45,18.54 10.79,18.54 10.79,17.78 9.91,17.78
VEXT
  Top 0.813: CON5.12 4.51,7.82 D2.2
  pour Top (no thermals): 3.94,9.91 6.1,9.91 6.1,8.51 6.1,7.75 3.94,7.75